# Altium PCB PCB1.PcbDoc (part 2 of 2)
Units mil, origin at the board's own origin, x right, y up, seen from the top; angles counter-clockwise.
Board outline 5190.03 x 3710.02 mil, 4 copper layers (Top Layer, nixie tubes, GND, Bottom Layer), stack 23.756 mil thick; 74 components, 90 nets, 262 pads, 53 vias.
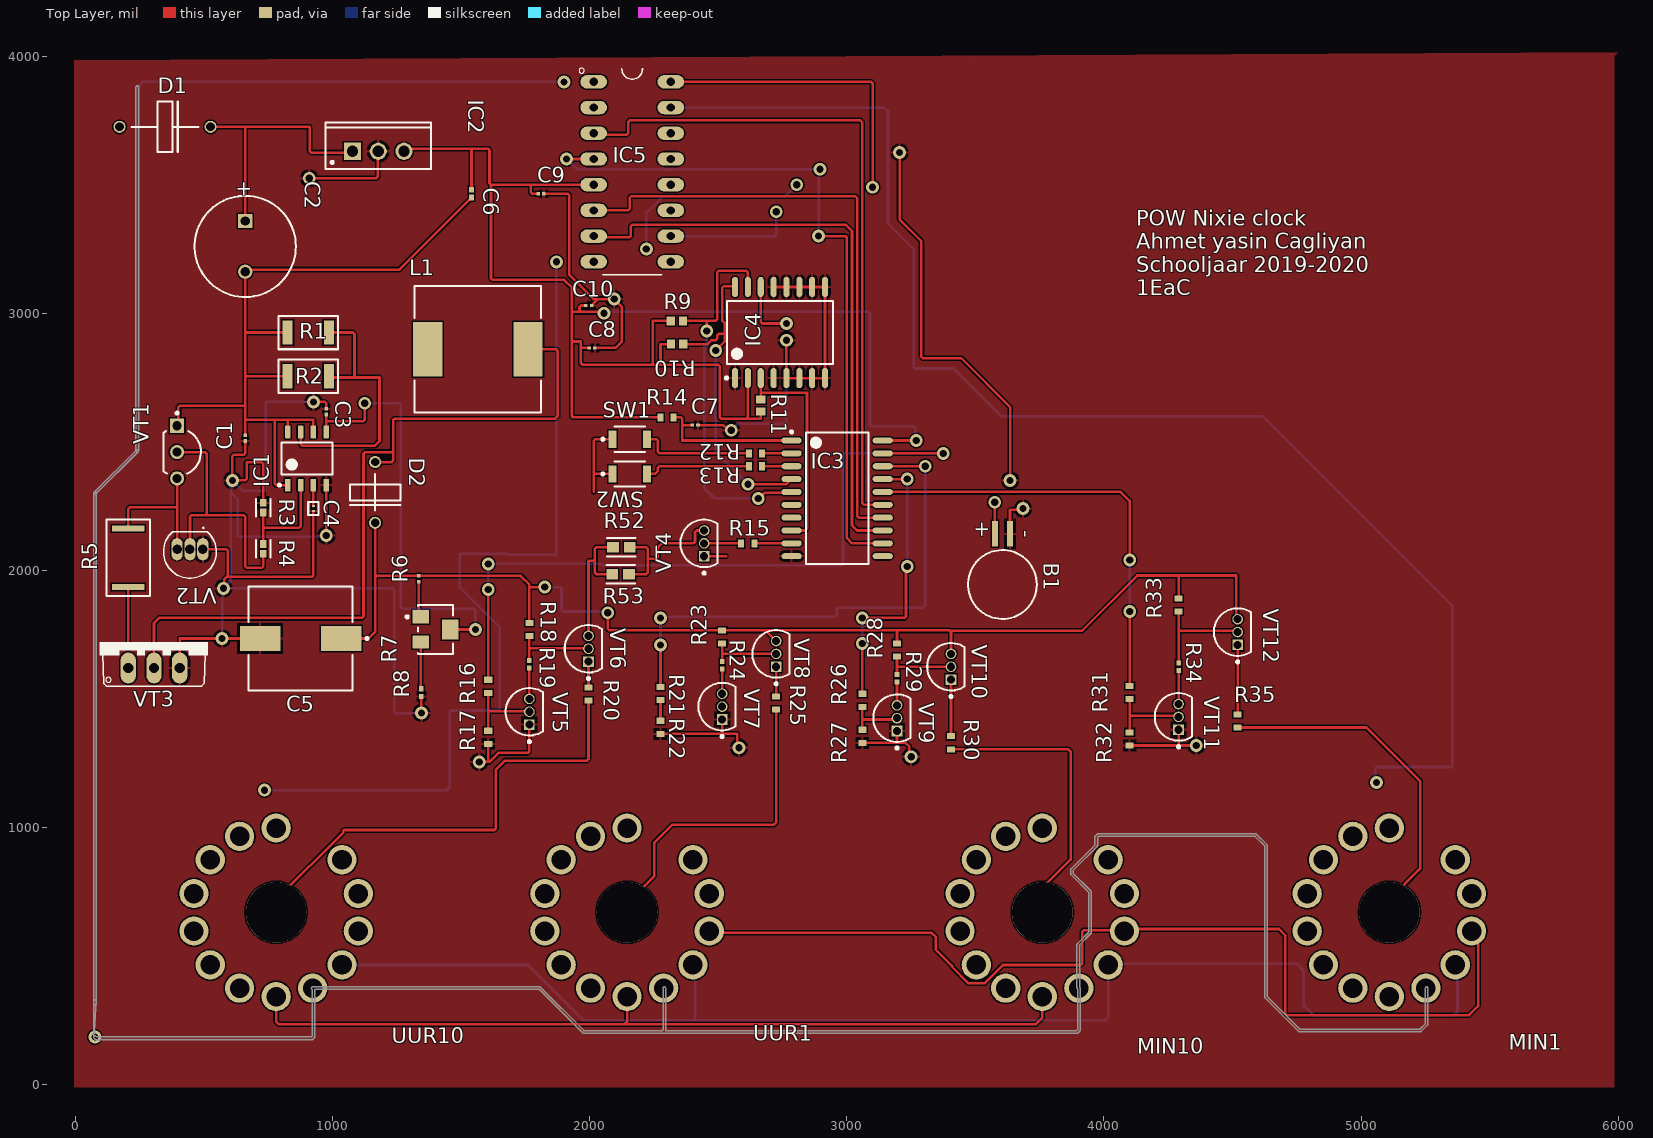
[diagram p0: Top Layer view]

## Part data (continued)
R8: library part RC0402FR-073K3L, Case Code (Imperial)=0402, Case Code (Metric)=1005, Manufacturer=Yageo, Max Operating Temperature=155°C, Max Power Dissipation=63mW, Min Operating Temperature=-55°C, Package Quantity=1, Power Rating=62.5mW, Resistance=3.3kR, Supplier Part Number 1=311-3.30KLRCT-ND, Temperature Coefficient=100ppm/°C, Tolerance=1%, Voltage Rating=50V, Case/Package=0402, Category="Chip SMD Resistors", ComponentLink1Description=https://datasheet.ciiva.com/11808/0900766b80c66297-11808441.pdf?src-supplier=RSComponents, ComponentLink1URL=https://datasheet.ciiva.com/11808/0900766b80c66297-11808441.pdf?src-supplier=RSComponents, ComponentLink2Description=https://datasheet.ciiva.com/2453/pyu-r-int-thick-7-2453395.pdf?src-supplier=Digi-Key, ComponentLink2URL=https://datasheet.ciiva.com/2453/pyu-r-int-thick-7-2453395.pdf?src-supplier=Digi-Key, ComponentLink3Description=https://datasheet.ciiva.com/16746/pyu-rc0402-51-rohs-l-6-r-16746361.pdf?src-supplier=Future+Electronics, ComponentLink3URL=https://datasheet.ciiva.com/16746/pyu-rc0402-51-rohs-l-6-r-16746361.pdf?src-supplier=Future+Electronics, ComponentLink4Description=https://datasheet.ciiva.com/2453/pyu-r-int-thick-7-2453394.pdf?src-supplier=Digi-Key, ComponentLink4URL=https://datasheet.ciiva.com/2453/pyu-r-int-thick-7-2453394.pdf?src-supplier=Digi-Key, ComponentLink5Description=https://datasheet.ciiva.com/2453/pyu-r-int-thick-7-2453396.pdf?src-supplier=Digi-Key, ComponentLink5URL=https://datasheet.ciiva.com/2453/pyu-r-int-thick-7-2453396.pdf?src-supplier=Digi-Key, ComponentLink6Description=https://datasheet.ciiva.com/46394/1018594-46394940.pdf?src-supplier=Element14, ComponentLink6URL=https://datasheet.ciiva.com/46394/1018594-46394940.pdf?src-supplier=Element14, Composition="Thick Film", Depth=0.5mm, Features="Moisture Resistant", Height=0.016inch, Lead Free="Lead Free", Length=1mm, Manufacturer Part Number=RC0402FR-073K3L, Military Standard=Not, Number of Pins=2, Number of Terminations=2, Packaging="Tape and Reel", Pricing 1="1=0,10000, 10=0,01600, 100=0,00640, 1000=0,00289, 2500=0,00251, 5000=0,00207 (USD)", REACH SVHC="No SVHC", RoHS=Yes, Stock 1=9680590, Supplier 1=Digi-Key, Termination=SMD/SMT, Voltage Rating (DC)=50V, Width=0.5mm
R9 R10 R11: library part ERA-3AEB512V, "5K1Ohm // 3.49", Case Code (Imperial)=0603, Case Code (Metric)=1608, Manufacturer=Panasonic, Max Operating Temperature=155°C, Max Power Dissipation=100mW, Min Operating Temperature=-55°C, Package Quantity=5000, Resistance=5.1kR, Supplier Part Number 1=P5.1KDBCT-ND, Temperature Coefficient=25ppm/°C, Tolerance=0.1%, Voltage Rating=75V, Case/Package=0603, Category="Chip SMD Resistors", ComponentLink1Description=https://datasheet.ciiva.com/29183/451140-da-01-en-widerstand-0603-era-29183792.pdf?src-supplier=Conrad, ComponentLink1URL=https://datasheet.ciiva.com/29183/451140-da-01-en-widerstand-0603-era-29183792.pdf?src-supplier=Conrad, ComponentLink2Description=https://datasheet.ciiva.com/5860/485442-5860519.pdf?src-supplier=Farnell, ComponentLink2URL=https://datasheet.ciiva.com/5860/485442-5860519.pdf?src-supplier=Farnell, ComponentLink3Description=https://datasheet.ciiva.com/5860/485442-5860520.pdf?src-supplier=Farnell, ComponentLink3URL=https://datasheet.ciiva.com/5860/485442-5860520.pdf?src-supplier=Farnell, ComponentLink4Description=https://datasheet.ciiva.com/24025/aoa0000ce26-197354-24025560.pdf?src-supplier=Mouser, ComponentLink4URL=https://datasheet.ciiva.com/24025/aoa0000ce26-197354-24025560.pdf?src-supplier=Mouser, Composition="Thin Film", Contact Plating=Tin, Depth=0.8mm, Height=0.022inch, Lead Free="Lead Free", Length=1.6mm, Manufacturer Part Number=ERA-3AEB512V, Military Standard=Not, Mount="Surface Mount", Number of Pins=2, Number of Terminations=2, Packaging="Tape and Reel", Power Rating=100mW, Pricing 1="1=0,34000, 10=0,28600, 100=0,11160, 1000=0,04673, 2500=0,04284 (USD)", Radiation Hardening=No, REACH SVHC="No SVHC", RoHS=Yes, Stock 1=8134, Supplier 1=Digi-Key, Termination=Solder, Voltage Rating (DC)=75V, Width=0.031inch
R12 R13 R14: library part RC0603JR-071KL, "1KOhm // 3.46", Case Code (Imperial)=0603, Case Code (Metric)=1608, Manufacturer=Yageo, Max Operating Temperature=155°C, Min Operating Temperature=-55°C, Package Quantity=5000, Power Rating=100mW, Resistance=1kR, Supplier Part Number 1=311-1.0KGRCT-ND, Temperature Coefficient=100ppm/°C, Tolerance=5%, Voltage Rating=50V, Case/Package=0603, Category="Chip SMD Resistors", ComponentLink1Description=https://datasheet.ciiva.com/8883/pyu-rc0603-51-rohs-l-4-8883051.pdf?src-supplier=Avnet, ComponentLink1URL=https://datasheet.ciiva.com/8883/pyu-rc0603-51-rohs-l-4-8883051.pdf?src-supplier=Avnet, ComponentLink2Description=https://datasheet.ciiva.com/7746/443971-7746461.pdf?src-supplier=Element14, ComponentLink2URL=https://datasheet.ciiva.com/7746/443971-7746461.pdf?src-supplier=Element14, ComponentLink3Description=https://datasheet.ciiva.com/7746/443971-7746462.pdf?src-supplier=Element14, ComponentLink3URL=https://datasheet.ciiva.com/7746/443971-7746462.pdf?src-supplier=Element14, ComponentLink4Description=https://datasheet.ciiva.com/22747/443971-22747533.pdf?src-supplier=Element14, ComponentLink4URL=https://datasheet.ciiva.com/22747/443971-22747533.pdf?src-supplier=Element14, Composition="Thick Film", Contact Plating=Tin,Matte, Depth=0.8mm, Height=0.45mm, Lead Free="Lead Free", Length=1.6mm, Manufacturer Part Number=RC0603JR-071KL, Military Standard=Not, Number of Pins=2, Packaging="Tape and Reel", Pricing 1="1=0,10000, 10=0,01900, 100=0,00770, 1000=0,00347, 2500=0,00301 (USD)", Radiation Hardening=No, REACH SVHC=Unknown, RoHS=Yes, Stock 1=7711035, Supplier 1=Digi-Key, Termination=SMD/SMT, Voltage Rating (DC)=50V, Width=0.8mm
R15 R16 R17 R18 R20 R21 R22 R23 R25 R26 R27 R28 R30 R31 R32 R33 R35: library part RC0603JR-0710KL, "10KOhm // 3.51", Case Code (Imperial)=0603, Case Code (Metric)=1608, Manufacturer=Yageo, Max Operating Temperature=155°C, Max Power Dissipation=100mW, Min Operating Temperature=-55°C, Resistance=10kR, Supplier Part Number 1=311-10KGRCT-ND, Temperature Coefficient=100ppm/°C, Tolerance=5%, Voltage Rating=50V, Case/Package=0603, Category="Chip SMD Resistors", ComponentLink1Description=https://datasheet.ciiva.com/2452/pyu-rc-group-51-rohs-l-10-2452848.pdf?src-supplier=Digi-Key, ComponentLink1URL=https://datasheet.ciiva.com/2452/pyu-rc-group-51-rohs-l-10-2452848.pdf?src-supplier=Digi-Key, Composition="Thick Film", Contact Plating=Tin,Matte, Depth=0.8mm, Features="Moisture Resistant", Height - Seated (Max)=0.022inch, Lead Free="Lead Free", Length=0.063inch, Manufacturer Part Number=RC0603JR-0710KL, Military Standard=Not, Number of Pins=2, Number of Terminations=2, Packaging="Tape and Reel", Power Rating=100mW, Pricing 1="1=0,10000, 10=0,01900, 100=0,00770, 1000=0,00347, 2500=0,00301 (USD)", Radiation Hardening=No, REACH SVHC=Unknown, RoHS=Yes, Stock 1=1984024, Supplier 1=Digi-Key, Termination=SMD/SMT, Voltage Rating (DC)=50V, Width=0.031inch
R19 R24 R29 R34: library part RC0402FR-071ML, "1M //  5.09", Case Code (Imperial)=0402, Case Code (Metric)=1005, Manufacturer=Yageo, Max Operating Temperature=155°C, Min Operating Temperature=-55°C, Power Rating=63mW, Resistance=1MR, Supplier Part Number 1=311-1.00MLRCT-ND, Temperature Coefficient=100ppm/°C, Tolerance=1%, Voltage Rating=50V, Case/Package=0402, Category="Chip SMD Resistors", ComponentLink1Description=https://datasheet.ciiva.com/11808/0900766b80c66297-11808125.pdf?src-supplier=RSComponents, ComponentLink1URL=https://datasheet.ciiva.com/11808/0900766b80c66297-11808125.pdf?src-supplier=RSComponents, ComponentLink2Description=https://datasheet.ciiva.com/46394/1018594-46394951.pdf?src-supplier=Element14, ComponentLink2URL=https://datasheet.ciiva.com/46394/1018594-46394951.pdf?src-supplier=Element14, ComponentLink3Description=https://datasheet.ciiva.com/16741/pyu-rc0402-51-rohs-l-6-r-16741081.pdf?src-supplier=Future+Electronics, ComponentLink3URL=https://datasheet.ciiva.com/16741/pyu-rc0402-51-rohs-l-6-r-16741081.pdf?src-supplier=Future+Electronics, ComponentLink4Description=https://datasheet.ciiva.com/7849/1018594-7849882.pdf?src-supplier=Element14, ComponentLink4URL=https://datasheet.ciiva.com/7849/1018594-7849882.pdf?src-supplier=Element14, ComponentLink5Description=https://datasheet.ciiva.com/7849/1018594-7849883.pdf?src-supplier=Element14, ComponentLink5URL=https://datasheet.ciiva.com/7849/1018594-7849883.pdf?src-supplier=Element14, Composition="Thick Film", Depth=0.5mm, Height=0.32mm, Lead Free="Lead Free", Length=1mm, Manufacturer Part Number=RC0402FR-071ML, Military Standard=Not, Packaging="Tape and Reel", Pricing 1="1=0,10000, 10=0,01600, 100=0,00640, 1000=0,00289, 2500=0,00251, 5000=0,00207 (USD)", REACH SVHC=Unknown, RoHS=Yes, Stock 1=3299075, Supplier 1=Digi-Key, Termination=SMD/SMT
R52 R53: library part CRGCQ0603F220K, "220KOhm //  5.12", Case Code (Imperial)=0603, Case Code (Metric)=1608, Manufacturer="TE Connectivity", Max Operating Temperature=155°C, Max Power Dissipation=100mW, Min Operating Temperature=-55°C, Resistance=220kR, Supplier Part Number 1=A129716CT-ND, Temperature Coefficient=100ppm/°C, Tolerance=1%, Case/Package=0603, ComponentLink1Description=https://4donline.ihs.com/images/VipMasterIC/IC/TYEL/TYEL-S-A0004929575/TYEL-S-A0004929575-1.pdf?hkey=52A5661711E402568146F3353EA87419&src-supplier=Newark, ComponentLink1URL=https://4donline.ihs.com/images/VipMasterIC/IC/TYEL/TYEL-S-A0004929575/TYEL-S-A0004929575-1.pdf?hkey=52A5661711E402568146F3353EA87419&src-supplier=Newark, ComponentLink2Description=https://www.te.com/commerce/DocumentDelivery/DDEController?Action=srchrtrv&amp;DocNm=1773204-3&amp;DocType=DS&amp;DocLang=English&src-supplier=Digi-Key, ComponentLink2URL=https://www.te.com/commerce/DocumentDelivery/DDEController?Action=srchrtrv&amp;DocNm=1773204-3&amp;DocType=DS&amp;DocLang=English&src-supplier=Digi-Key, ComponentLink3Description=https://4donline.ihs.com/images/VipMasterIC/IC/TYEL/TYEL-S-A0004929575/TYEL-S-A0004929575-1.pdf?hkey=52A5661711E402568146F3353EA87419&src-supplier=Farnell, ComponentLink3URL=https://4donline.ihs.com/images/VipMasterIC/IC/TYEL/TYEL-S-A0004929575/TYEL-S-A0004929575-1.pdf?hkey=52A5661711E402568146F3353EA87419&src-supplier=Farnell, Composition="Thick Film", Features="Moisture Resistant,Automotive AEC-Q200", Manufacturer Part Number=CRGCQ0603F220K, Number of Terminations=2, Packaging="Cut Tape", Pricing 1="1=0,10000, 10=0,03000, 100=0,01200, 1000=0,00541, 2500=0,00469 (USD)", RoHS=No, Stock 1=53942, Supplier 1=Digi-Key
SW1 SW2: "SWITCH TACTILE SPST-NO 0.05A 12V", Contact Current Rating=50mA, Contact Resistance=100mR, Insulation Resistance=100MR, Manufacturer=Omron, Max Operating Temperature=70°C, Max Voltage Rating (DC)=12V, Min Operating Temperature=-25°C, Operating Force=1.5N, Package Quantity=1, Ratings="Dust Proof,IP40", Supplier Part Number 1=SW1020CT-ND, Actuator Length=0.4mm, Actuator Type=Standard, Category="Tactile Switches", ComponentLink1Description=https://datasheet.ciiva.com/26917/getdatasheetpartid-552554-26917552.pdf?src-supplier=Verical, ComponentLink1URL=https://datasheet.ciiva.com/26917/getdatasheetpartid-552554-26917552.pdf?src-supplier=Verical, ComponentLink2Description=https://datasheet.ciiva.com/22696/1685550-22696214.pdf?src-supplier=Element14, ComponentLink2URL=https://datasheet.ciiva.com/22696/1685550-22696214.pdf?src-supplier=Element14, ComponentLink3Description=https://datasheet.ciiva.com/1532/1685550-1532680.pdf?src-supplier=Element14, ComponentLink3URL=https://datasheet.ciiva.com/1532/1685550-1532680.pdf?src-supplier=Element14, ComponentLink4Description=https://datasheet.ciiva.com/1634/1685550-1634396.pdf?src-supplier=Farnell, ComponentLink4URL=https://datasheet.ciiva.com/1634/1685550-1634396.pdf?src-supplier=Farnell, ComponentLink5Description=https://datasheet.ciiva.com/14142/b3u-eng-datasheet-14142540.pdf?src-supplier=Distrelec, ComponentLink5URL=https://datasheet.ciiva.com/14142/b3u-eng-datasheet-14142540.pdf?src-supplier=Distrelec, ComponentLink6Description=https://datasheet.ciiva.com/2900/b3u-1110-2900029.pdf?src-supplier=Digi-Key, ComponentLink6URL=https://datasheet.ciiva.com/2900/b3u-1110-2900029.pdf?src-supplier=Digi-Key, ComponentLink7Description=https://datasheet.ciiva.com/16155/en-b3u-16155021.pdf?src-supplier=Onlinecomponents.com, ComponentLink7URL=https://datasheet.ciiva.com/16155/en-b3u-16155021.pdf?src-supplier=Onlinecomponents.com, ComponentLink8Description=https://datasheet.ciiva.com/2900/b3u-1110-2900030.pdf?src-supplier=Digi-Key, ComponentLink8URL=https://datasheet.ciiva.com/2900/b3u-1110-2900030.pdf?src-supplier=Digi-Key, ComponentLink9Description=https://datasheet.ciiva.com/16862/70176037-16862846.pdf?src-supplier=Allied+Electronics, ComponentLink9URL=https://datasheet.ciiva.com/16862/70176037-16862846.pdf?src-supplier=Allied+Electronics, ComponentLink10Description=https://datasheet.ciiva.com/2900/b3u-1110-2900031.pdf?src-supplier=Digi-Key, ComponentLink10URL=https://datasheet.ciiva.com/2900/b3u-1110-2900031.pdf?src-supplier=Digi-Key, Contact Material=Silver, Current Rating=50mA, Depth=2.5mm, Electrical Life=200000Cycles, Height=1.2mm, Illumination Type=Non-Illuminated,Illuminated, Lead Free="Lead Free", Length=4mm, Manufacturer Part Number=B3U-1000P, Max Current Rating=50mA, Mechanical Life=200000Cycles, Mount="Surface Mount", Orientation=Straight, Packaging="Tape and Reel", Pricing 1="1=0,98000, 10=0,94300, 25=0,88120, 100=0,76500, 250=0,69612, 500=0,64536, 1000=0,59822 (USD)", REACH SVHC=Unknown, RoHS=Yes, Stock 1=6825, Supplier 1=Digi-Key, Switch Function=Off-Mom, Switch Travel=0.15mm, Termination=SMD/SMT, Throw Configuration=SPST, Voltage Rating (DC)=12V, Weight=0.000776oz, Width=3mm
VT1: Case/Package=TO-92, Collector Base Voltage (VCBO)=80V, Collector Emitter Breakdown Voltage=65V, Collector Emitter Saturation Voltage=250mV, Current Rating=100mA, Emitter Base Voltage (VEBO)=6V, Frequency=300MHz, Manufacturer="ON Semiconductor / Fairchild", Max Operating Temperature=150°C, Max Power Dissipation=500mW, Min Operating Temperature=-65°C, Package Quantity=2000, Supplier Part Number 1=BC546-ND, Category=BJTs, Collector Emitter Voltage (VCEO)=65V, ComponentLink1Description=https://datasheet.ciiva.com/982/bc546-982426.pdf?src-supplier=Digi-Key, ComponentLink1URL=https://datasheet.ciiva.com/982/bc546-982426.pdf?src-supplier=Digi-Key, ComponentLink2Description=https://datasheet.ciiva.com/1217/bc546-1217060.pdf?src-supplier=Farnell, ComponentLink2URL=https://datasheet.ciiva.com/1217/bc546-1217060.pdf?src-supplier=Farnell, ComponentLink3Description=https://datasheet.ciiva.com/1195/59761-1195461.pdf?src-supplier=Element14, ComponentLink3URL=https://datasheet.ciiva.com/1195/59761-1195461.pdf?src-supplier=Element14, ComponentLink4Description=https://datasheet.ciiva.com/4724/bc546-4724309.pdf?src-supplier=Mouser, ComponentLink4URL=https://datasheet.ciiva.com/4724/bc546-4724309.pdf?src-supplier=Mouser, Element Configuration=Single, Gain Bandwidth Product=300MHz, hFE Min=110, Lead Free="Lead Free", Manufacturer Part Number=BC546, Max Collector Current=100mA, Max Frequency=300MHz, Mount="Through Hole", Number of Elements=1, Number of Pins=3, Packaging=Bulk, Polarity=NPN, Power Dissipation=500mW, Radiation Hardening=No, REACH SVHC="No SVHC", RoHS=Yes, Supplier 1=Digi-Key, Termination="Through Hole", Transition Frequency=300MHz, Voltage Rating (DC)=65V, Weight=0.2g
VT2: library part BC556ABU, Case/Package=TO-92, Collector Base Voltage (VCBO)=-80V, Collector Emitter Breakdown Voltage=65V, Collector Emitter Saturation Voltage=-250mV, Current Rating=-100mA, Emitter Base Voltage (VEBO)=-5V, Frequency=150MHz, Manufacturer="ON Semiconductor / Fairchild", Max Collector Current=100mA, Max Frequency=10MHz, Max Operating Temperature=150°C, Max Power Dissipation=500mW, Min Operating Temperature=-65°C, Package Quantity=1000, Supplier Part Number 1=BC556ABU-ND, Voltage Rating (DC)=-65V, Category=BJTs, Collector Emitter Voltage (VCEO)=65V, ComponentLink1Description=https://datasheet.ciiva.com/46415/1817587-46415448.pdf?src-supplier=Element14, ComponentLink1URL=https://datasheet.ciiva.com/46415/1817587-46415448.pdf?src-supplier=Element14, ComponentLink2Description=https://datasheet.ciiva.com/11205/bc559-11205934.pdf?src-supplier=Avnet, ComponentLink2URL=https://datasheet.ciiva.com/11205/bc559-11205934.pdf?src-supplier=Avnet, ComponentLink3Description=https://datasheet.ciiva.com/979/bc556-979028.pdf?src-supplier=Digi-Key, ComponentLink3URL=https://datasheet.ciiva.com/979/bc556-979028.pdf?src-supplier=Digi-Key, ComponentLink4Description=https://datasheet.ciiva.com/4722/bc556-4722509.pdf?src-supplier=Mouser, ComponentLink4URL=https://datasheet.ciiva.com/4722/bc556-4722509.pdf?src-supplier=Mouser, Contact Plating=Tin,Matte, Element Configuration=Single, Gain Bandwidth Product=150MHz, Height=5.33mm, hFE Min=110, Lead Free="Lead Free", Length=5.2mm, Manufacturer Part Number=BC556ABU, Mount="Through Hole", Number of Elements=1, Number of Pins=3, Packaging=Bulk, Polarity=PNP, Power Dissipation=500mW, Pricing 1="1=0,23000, 10=0,18600, 25=0,15560, 100=0,07610, 250=0,07492, 500=0,06350, 1000=0,04412, 2500=0,04100, 5000=0,03547 (USD)", REACH SVHC="No SVHC", RoHS=Yes, Stock 1=3751, Supplier 1=Digi-Key, Transition Frequency=150MHz, Weight=0.179g, Width=4.19mm
VT3: "P-Channel 20V 6.7A _Ta_ 2.5W _Ta_ Surface Mount 8-SO", Package="TO-220 STMicroelectronics", Availability=Unavailable, MF="Vishay Siliconix", MP=IRF740, Price=None, SnapEDA_Link=https://www.snapeda.com/parts/IRF740/Vishay%20Siliconix/view-part/580033/?ref=snap
VT4 VT5 VT7 VT9 VT11: library part MPSA42G, "MPSA42 // 5.16", Case/Package=TO-92-3, Collector Base Voltage (VCBO)=300V, Collector Emitter Saturation Voltage=500mV, Current Rating=500mA, Emitter Base Voltage (VEBO)=6V, Frequency=50MHz, Manufacturer="ON Semiconductor", Max Operating Temperature=150°C, Max Power Dissipation=625mW, Min Operating Temperature=-55°C, Package Quantity=5000, Category=BJTs, Collector Emitter Breakdown Voltage=300V, Collector Emitter Voltage (VCEO)=300V, ComponentLink1Description=https://datasheet.ciiva.com/15138/getdatasheetpartid-59770-15138880.pdf?src-supplier=Verical, ComponentLink1URL=https://datasheet.ciiva.com/15138/getdatasheetpartid-59770-15138880.pdf?src-supplier=Verical, ComponentLink2Description=https://datasheet.ciiva.com/14179/snmpsa42-mpsa43-e-14179434.pdf?src-supplier=Distrelec, ComponentLink2URL=https://datasheet.ciiva.com/14179/snmpsa42-mpsa43-e-14179434.pdf?src-supplier=Distrelec, ComponentLink3Description=https://datasheet.ciiva.com/19482/878622-19482654.pdf?src-supplier=Jameco, ComponentLink3URL=https://datasheet.ciiva.com/19482/878622-19482654.pdf?src-supplier=Jameco, ComponentLink4Description=https://datasheet.ciiva.com/6359/mpsa42-d-6359479.pdf?src-supplier=Digi-Key, ComponentLink4URL=https://datasheet.ciiva.com/6359/mpsa42-d-6359479.pdf?src-supplier=Digi-Key, ComponentLink5Description=https://datasheet.ciiva.com/11197/mpsa42-d-11197448.pdf?src-supplier=Avnet, ComponentLink5URL=https://datasheet.ciiva.com/11197/mpsa42-d-11197448.pdf?src-supplier=Avnet, ComponentLink6Description=https://datasheet.ciiva.com/18404/70099551-18404762.pdf?src-supplier=Allied+Electronics, ComponentLink6URL=https://datasheet.ciiva.com/18404/70099551-18404762.pdf?src-supplier=Allied+Electronics, ComponentLink7Description=https://datasheet.ciiva.com/16201/mpsa42-d-16201884.pdf?src-supplier=Future+Electronics, ComponentLink7URL=https://datasheet.ciiva.com/16201/mpsa42-d-16201884.pdf?src-supplier=Future+Electronics, ComponentLink8Description=https://datasheet.ciiva.com/26114/mpsa42-d-26114876.pdf?src-supplier=Avnet+Europe, ComponentLink8URL=https://datasheet.ciiva.com/26114/mpsa42-d-26114876.pdf?src-supplier=Avnet+Europe, Element Configuration=Single, Gain Bandwidth Product=50MHz, Height=5.33mm, hFE Min=25, Lead Free="Lead Free", Length=5.2mm, Manufacturer Part Number=MPSA42G, Max Collector Current=500mA, Max Frequency=50MHz, Number of Elements=1, Number of Pins=3, Packaging=Bulk, Polarity=NPN, Power Dissipation=625mW, Pricing 1="1=0,07000, 25=0,07000, 100=0,07000, 500=0,07000, 1000=0,07000 (USD)", Radiation Hardening=No, REACH SVHC="No SVHC", RoHS=Yes, Stock 1=2, Supplier 1="Rochester Electronics", Supplier Part Number 1=MPSA42G, Transition Frequency=50MHz, Voltage Rating (DC)=300V, Weight=0.01lb, Width=4.19mm
VT6 VT8 VT10 VT12: library part MPSA92G, "MPSA92 // 5.19", Case/Package=TO-92-3, Collector Base Voltage (VCBO)=300V, Collector Emitter Saturation Voltage=-500mV, Current Rating=-500mA, Emitter Base Voltage (VEBO)=5V, Frequency=50MHz, Manufacturer="ON Semiconductor", Max Collector Current=500mA, Max Operating Temperature=150°C, Max Power Dissipation=625mW, Min Operating Temperature=-55°C, Package Quantity=5000, Voltage Rating (DC)=-300V, Category="Integrated Circuits (ICs)", Collector Emitter Breakdown Voltage=300V, Collector Emitter Voltage (VCEO)=300V, ComponentLink1Description=https://datasheet.ciiva.com/27050/801254-27050123.pdf?src-supplier=Jameco, ComponentLink1URL=https://datasheet.ciiva.com/27050/801254-27050123.pdf?src-supplier=Jameco, ComponentLink2Description=https://datasheet.ciiva.com/14179/mimpsa92-mpsa93-en-14179436.pdf?src-supplier=Distrelec, ComponentLink2URL=https://datasheet.ciiva.com/14179/mimpsa92-mpsa93-en-14179436.pdf?src-supplier=Distrelec, ComponentLink3Description=https://datasheet.ciiva.com/7972/672186-7972101.pdf?src-supplier=Element14, ComponentLink3URL=https://datasheet.ciiva.com/7972/672186-7972101.pdf?src-supplier=Element14, ComponentLink4Description=https://datasheet.ciiva.com/7972/672186-7972102.pdf?src-supplier=Element14, ComponentLink4URL=https://datasheet.ciiva.com/7972/672186-7972102.pdf?src-supplier=Element14, ComponentLink5Description=https://datasheet.ciiva.com/14546/70099552-14546054.pdf?src-supplier=Allied+Electronics, ComponentLink5URL=https://datasheet.ciiva.com/14546/70099552-14546054.pdf?src-supplier=Allied+Electronics, ComponentLink6Description=https://datasheet.ciiva.com/16463/mpsa92-d-16463878.pdf?src-supplier=Future+Electronics, ComponentLink6URL=https://datasheet.ciiva.com/16463/mpsa92-d-16463878.pdf?src-supplier=Future+Electronics, ComponentLink7Description=https://datasheet.ciiva.com/11197/mpsa92-d-11197607.pdf?src-supplier=Avnet, ComponentLink7URL=https://datasheet.ciiva.com/11197/mpsa92-d-11197607.pdf?src-supplier=Avnet, ComponentLink8Description=https://datasheet.ciiva.com/16478/mpsa92-d-16478619.pdf?src-supplier=Avnet+Asia, ComponentLink8URL=https://datasheet.ciiva.com/16478/mpsa92-d-16478619.pdf?src-supplier=Avnet+Asia, ComponentLink9Description=https://datasheet.ciiva.com/26114/mpsa92-d-26114891.pdf?src-supplier=Avnet+Europe, ComponentLink9URL=https://datasheet.ciiva.com/26114/mpsa92-d-26114891.pdf?src-supplier=Avnet+Europe, ComponentLink10Description=https://datasheet.ciiva.com/6359/mpsa92-d-6359455.pdf?src-supplier=Digi-Key, ComponentLink10URL=https://datasheet.ciiva.com/6359/mpsa92-d-6359455.pdf?src-supplier=Digi-Key, Element Configuration=Single, Gain Bandwidth Product=50MHz, Height=5.33mm, hFE Min=25, Lead Free="Lead Free", Length=5.2mm, Manufacturer Part Number=MPSA92G, Max Frequency=50MHz, Number of Elements=1, Number of Pins=3, Packaging=Bulk, Polarity=PNP, Power Dissipation=625mW, Pricing 1="1=0,25000, 21=0,20000, 51=0,12500, 401=0,09000 (USD)", Radiation Hardening=No, REACH SVHC="No SVHC", RoHS=Yes, Stock 1=3237, Supplier 1=Quest, Supplier Part Number 1=MPSA92G, Transition Frequency=50MHz, Weight=0.01lb, Width=4.19mm

## Via types
v1: diameter 50, hole 28, Top Layer to Bottom Layer, 53 vias

## Nets (pads, with @x,y where several pads share a name; then routed paths per layer and width w, separated by ;. In a path a pad name is that pad's centre, name@x,y a point inside that pad or via, vN(x,y) a via of type N, cw(c..) or ccw(c..) an arc to the next point about the centre after c; other vN are vias at no path point)
9-15V: 
"9-15V DC INPUT": 
+5V: 
GND: B1.2 C1.2 C3.2 C4.2 C5.2 C7.2 C8.2 C9.2 C10.2 IC1.4 IC2.2 IC3.10 IC4.1 IC4.4 IC4.5 IC4.6 IC4.7 IC4.8 IC4.9 IC4.10 IC4.11 IC4.12 IC4.13 R3.1 R8.1 R17.1 R22.1 R27.1 R32.1 VT2.1 VT3.S VT5.1 VT7.1 VT9.1 VT11.1 | length 14577.5
  Top Layer w10: VT3.S 405,1734.14 ; 405,1735 v1(570,1735) C5.2 ; VT2.1@505,2082.05 586.77,2082.05 592.63,2076.19 592.63,1979.14 ; v1(575,1930) 577.53,1932.53 577.53,1964.04 592.63,1979.14 ; C1.2 660,2455.86 654.14,2450 615.86,2450 610,2444.14 v1(610,2350) 659.14,2350 665,2355.86 665,2420 ; 665.86,2420 724.14,2420 730,2414.14 R3.1 ; v1(908.94,3525) 1169.14,3525 1175,3530.86 IC2.2@1175,3630 ; C4.2 925,1980.86 919.14,1975 592.63,1975 592.63,1979.14 ; v1(925,2655) 969.14,2655 975,2649.14 C3.2 ; v1(975,2135) IC1.4 ; v1(1345,1445) R8.1 ; v1(1570,1255) 1610,1255 ; R17.1 1605,1260 1610,1255 ; VT5.1 1765,1295.86 1759.14,1290 1645,1290 1610,1255 ; C9.2 1914.14,3465 1920,3459.14 1920,3150 2015,3055 2032.05,3055 ; C10.2 2007.83,3030 2009.13,3031.3 2009.13,3032.09 2032.05,3055 ; C8.2 2100,2865 2125,2890 2125,3025 v1(2095,3055) 2032.05,3055 ; R22.1 2573.82,1363.82 2573.82,1316.18 v1(2580,1310) ; C7.2 2519.18,2565 2539.18,2545 v1(2550,2545) ; 2515,1365 VT7.1 ; IC4.13 IC4.12 IC4.11 IC4.10 IC4.9 IC4.8 IC4.7 IC4.6 IC4.5 v1(2765,2895) ; R27.1 3228.82,1328.82 3242.64,1315 3242.64,1282.36 v1(3250,1275) ; 3195,1330 VT9.1 ; v1(3205,3625) 3205,3365 3290,3280 3290,2830.86 3295.86,2825 3445,2825 3635,2635 v1(3635,2350) ; B1.2 3634.53,2235 3680,2235 v1(3685,2240) ; R32.1 v1(4358.82,1318.82) ; 4290,1320 VT11.1
  nixie tubes w10: v1(2765,2895) 2575.86,2895 2570,2900.86 2570,3024.14 2564.14,3030 2140.86,3030 2135,3035.86 2135,3690 2085,3740 2050,3740 ccw(c2041,3700) 2041,3741 1981,3741 1980,3740 1891.02,3740 1825.86,3805.16 1825.86,3882.43 1884.43,3941 2972.28,3941 3205,3708.28 v1(3205,3625)
  Bottom Layer w10: v1(570,1735) 570,1925 v1(575,1930) ; v1(925,2655) 745.86,2655 740,2649.14 740,2315.86 734.14,2310 650,2310 v1(610,2350) 603.28,2343.28 603.28,2305 ; v1(975,2135) 970,2130 635.86,2130 630,2135.86 630,2278.28 603.28,2305 ; v1(1345,1445) 1245.86,1445 1240,1450.86 1240,1924.14 1234.14,1930 v1(575,1930) ; v1(2550,2545) 2575,2570 2759.14,2570 2765,2575.86 v1(2765,2895) ; v1(575,1930) 603.28,1958.28 603.28,2305
NetB?_15: B1.1 IC4.14 | length 1723.5
  Top Layer w10: IC4.14 2665,2965.86 2670.86,2960 v1(2765,2960) ; B1.1 v1@3575.47,2265
  nixie tubes w10: v1(2765,2960) 2770,2955 2979.14,2955 2985,2949.14 2985,2595.86 2990.86,2590 3365,2590 3369.98,2585.02 3575,2380 v1@3575,2275.58
  other v1: 3575,2265
NetBL1_82: 
NetBL1_83: 
NetBL2_83: 
NetBL3_82: 
NetBL3_83: 
NetC2_+: 
NetC3_49: C3.1 IC1.5 R7.2 | length 1681.9
  Top Layer w10: IC1.5 C3.1 ; 975,2580 1119.14,2580 1125,2585.86 v1(1125,2650) ; R7.2 v1(1555,1770)
  Bottom Layer w10: v1(1125,2650) 1259.14,2650 1265,2644.14 1265,2085 1265,1920 1265,1855.86 1270.86,1850 1549.14,1850 1555,1844.14 v1(1555,1770)
NetC4_51: C4.1 IC1.3 | length 81.8
  Top Layer w10: C4.1 IC1.3
NetC7_+: C7.1 IC3.1 R14.1 | length 580.4
  Top Layer w10: R14.1 2354.14,2595 2360,2589.14 2360,2565 ; C7.1@2395,2565 2360,2565 ; IC3.1 2360,2505 2360,2565
NetC8_49: 
NetD2_56: D2.A L1.2 VT3.D | length 2999.2
  Top Layer w10: VT3.D 305,1795 325,1815 1114.14,1815 1120,1820.86 1120,2454.14 1125.86,2460 1235,2460 ; D2.A 1229.14,2421.22 1235,2427.08 1235,2584.14 1240.86,2590 1865,2590 1875,2600 1875,2854.14 1869.14,2860 L1.2
NetGL1_82: 
NetGL1_83: 
NetGL2_83: 
NetGL3_82: 
NetGL3_83: 
NetIC1_2: IC1.2 R3.2 R4.1 | length 430.7
  Top Layer w10: R4.1 R3.2 ; 730,2165 869.14,2165 875,2170.86 IC1.2
NetIC1_7: IC1.7 R1.2 R2.2 | length 1082.2
  Top Layer w10: IC1.7 875,2490.86 880.86,2485 1164.14,2485 1182.07,2502.93 1182.07,2750 1085,2750 ; R2.2 990,2750 1085,2750 ; R1.2 1079.14,2925 1085,2919.14 1085,2750
NetIC3_2: IC3.2 R12.1 | length 115
  Top Layer w10: R12.1 IC3.2
NetIC3_3: IC3.3 R13.1 | length 114.4
  Top Layer w10: R13.1 IC3.3
NetIC3_4: IC3.4 IC4.16 R10.1 | length 1252.2
  Top Layer w10: R10.1 2415,2880 2458.43,2880 2473.43,2895 2489.14,2895 2495,2900.86 2495,2914.14 2500.86,2920 2525,2920 ; v1(2490,2855) 2525,2890 2525,2962.07 2515,2972.07 2515,3099.14 2520.86,3105 2562.17,3105 IC4.16 ; v1(2615,2335) 2765,2335 IC3.4
  Bottom Layer w10: v1(2490,2855) 2490,2460 v1(2615,2335)
NetIC3_5: IC3.5 IC4.15 R9.1 | length 1521.5
  Top Layer w10: R9.1 2455,2970 ; v1(2454.79,2930.39) 2455,2930.6 2455,2970 ; IC4.15 2615,3159.14 2609.14,3165 2500.86,3165 2495,3159.14 2495,2975.86 2489.14,2970 2455,2970 ; v1(2655,2280) 2658.28,2280 2680.78,2302.5 2782.5,2302.5 IC3.5
  Bottom Layer w10: v1(2454.79,2930.39) 2455,2930.19 2455,2876.3 2445,2866.3 2445,2320 2485,2280 v1(2655,2280)
NetIC3_8: IC3.8 IC4.3 R11.1 | length 854.4
  Top Layer w10: R11.1 2665,2690 ; IC4.3 2665,2690 ; IC3.8 2839.14,2155 2845,2160.86 2845,2690 2665,2690
NetIC3_9: IC3.9 R15.1 | length 145
  Top Layer w10: R15.1 IC3.9
NetIC3_12: IC3.12 IC5.4 | length 2793
  Top Layer w10: v1(1910,3600) IC5.4 ; v1@2895,3300 2994.14,3300 3000,3294.14 3000,2125 3020,2105 IC3.12
  Bottom Layer w10: v1(1910,3600) 1947.07,3562.93 1950,3560 2280,3560 ccw(c2289,3600) 2289,3559 2341,3559 ccw(c2341,3600) 2350,3560 v1(2895,3560) 2890,3555 v1(2890,3300)
NetIC3_13: IC3.13 IC5.7 | length 2332.7
  Top Layer w10: IC5.7 2020,3295 2154.14,3295 2160,3300.86 2160,3339.14 2165.86,3345 2994.14,3345 3020,3319.14 3020,2175 3040,2155 IC3.13
NetIC3_14: IC3.14 IC5.6 | length 2414.9
  Top Layer w10: IC5.6 2149.14,3400 2155,3405.86 2155,3449.14 2160.86,3455 3033.01,3455 3040,3448.01 3040,2210.86 3045.86,2205 IC3.14
NetIC3_15: IC3.15 IC5.3 | length 2661.4
  Top Layer w10: IC5.3 2020,3695 2144.14,3695 2150,3700.86 2150,3744.14 2155.86,3750 3052.01,3750 3060,3742.01 3060,2260.86 3065.86,2255 IC3.15
NetIC3_16: IC3.16 R31.2 | length 1694.6
  Top Layer w10: IC3.16 4065,2305 4100,2270 v1(4100,2040) ; R31.2 v1(4100,1840)
  Bottom Layer w10: v1(4100,1840) v1(4100,2040)
NetIC3_17: IC3.17 R26.2 | length 1099.3
  Top Layer w10: R26.2 v1(3060,1715) ; v1(3060,1815) 3224.14,1815 3230,1820.86 3230,2010 v1(3235,2015) ; IC3.17 v1(3235,2355)
  Bottom Layer w10: v1(3060,1715) v1(3060,1815) ; v1(3235,2015) v1(3235,2355)
NetIC3_18: IC3.18 R21.2 | length 2038.8
  Top Layer w10: R21.2 v1(2275,1710) ; IC3.18 v1(3305,2405)
  Bottom Layer w10: v1(2275,1710) v1(2275,1815) 2280,1820 2954.14,1820 2960,1825.86 2960,1849.14 2965.86,1855 3295,1855 3305,1865 v1(3305,2405)
NetIC3_19: IC3.19 R16.2 | length 2897.4
  Top Layer w10: R16.2 v1(1605,1925) ; IC3.19 v1(3375,2455)
  Bottom Layer w10: v1(1605,1925) v1(1605,2025) 2044.85,2025 2050.51,2019.33 2979.14,2019.33 2985,2025.19 2985,2145 ; 2985,2135 2985,2449.14 2990.86,2455 v1(3375,2455)
NetIC5_1: IC5.1 MIN1.P9 MIN10.P9 UUR1.P9 UUR10.P9 | length 12765.6
  nixie tubes w10: v1(75,185) 80,180 920,180 925,185 925,371.85 UUR10.P9 1805.28,374.72 1975,205 2284.14,205 ; v1(1900,3900) IC5.1 ; UUR1.P9@2290,374.72 2290,210.86 2284.14,205 ; MIN1.P9@5255,374.72 5255,235 5230,210 4760,210 4630,340 4630,930 4590,970 3975.86,970 3970,964.14 3970,930 3875,835 3875,820 3945,750 3945,590 3900,545 3900,376.85 MIN10.P9 3902.13,210.86 3896.27,205 2284.14,205
  Bottom Layer w10: v1(75,185) 75,325 ; 75,315 75,2300 240,2465 240,3880 260,3900 v1(1900,3900)
NetIC5_2: IC5.2 MIN1.P10 MIN10.P10 UUR1.P10 UUR10.P10 | length 11755.1
  nixie tubes w10: IC5.2 1900.86,3800 1895,3805.86 1895,3839.14 1900.86,3845 3040,3845 3140,3745 3140,3340 3240,3240 3240,2757.5 3245.86,2751.64 3414.93,2751.64 3586.57,2580 4462.06,2580 4610,2580 5330,1860 5330,970.86 5335.86,965 5380,965 5515,830 5515,520 5460,465 5366.97,465 MIN1.P10
  Bottom Layer w10: UUR10.P10 1036.97,465 1760,465 1975,250 2404.14,250 ; UUR1.P10@2410,465.67 2410,255.86 2404.14,250 ; MIN1.P10@5375,465.67 5375,285 5360.26,270.26 4814.74,270.26 4777.5,307.5 4777.5,442.5 4750,470 4020.63,470 MIN10.P10 4016.3,261.3 4005,250 2404.14,250
NetIC5_8: IC5.8 MIN1.P2 MIN10.P2 UUR1.P2 UUR10.P2 | length 8893.5
  nixie tubes w10: v1(735,1145) 730,1140 640,1140 640,967.4 UUR10.P2 710.67,965.28 750.18,925.77 830.77,925.77 855,950 870,965 870,1005 925,1060 1999.14,1060 2005,1054.14 2005,967.4 UUR1.P2 2010,958.15 2010,890.86 2015.86,885 2185,885 2214.14,885 2220,890.86 2220,1069.14 2225.86,1075 3508.15,1075 3623.01,960.14 3689.86,960.14 3717.09,939.95 ; v1(1870,3200) IC5.8 ; 3717.13,939.92 ccw(c3760,997.76) 3810.94,946.89 3845,980.95 3845,1005 3845,1084.14 3850.86,1090 4960,1090 4970,1080 MIN1.P2@4970,965.28
  Bottom Layer w10: v1(735,1145) 1445,1145 1455,1155 1455,1449.14 1460.86,1455 1644.14,1455 1650,1460.86 1650,1777.43 1495,1932.43 1495,2059.14 1500.86,2065 1677.07,2065 1682.07,2060 1864.14,2060 1870,2065.86 v1(1870,3200)
NetIC5_9: IC5.9 MIN1.P3 MIN10.P3 UUR1.P3 UUR10.P3 | length 10169.1
  nixie tubes w10: UUR10.P3@531.63,877.26 547.3,892.93 844.64,892.93 900,948.28 900,1005 933.36,1038.36 1887.07,1038.36 1892.93,1032.5 UUR1.P3@1892.93,877.26 ; UUR1.P3@1896.63,877.26 1908.89,865 2227.43,865 2245,882.57 2245,1027.43 2267.57,1050 3422.07,1050 3427.93,1044.14 3427.93,960.96 3515.96,872.93 3657.07,872.93 3662.93,878.79 3662.93,903.52 3668.1,908.7 3736.97,908.7 ccw(c3760,997.76) 3783.03,908.7 3805.41,908.7 3865,968.28 3865,1052.43 3882.57,1070 4850.86,1070 4862.93,1057.93 MIN1.P3@4862.93,877.26 ; IC5.9@2322.93,3202.93 3092.93,3202.93 3092.93,2628.79 3098.79,2622.93 3367.07,2622.93 3557.07,2432.93 4537.93,2432.93 5182.93,1787.93 5182.93,963.88 5096.31,877.26 MIN1.P3@4861.63,877.26
NetIC5_10: IC5.10 MIN1.P8 MIN10.P8 UUR1.P8 UUR10.P8 | length 11702.3
  Top Layer w10: UUR10.P8 780,245 790,235 2135,235 ; UUR1.P8 2145,245 2135,235 ; MIN10.P8 3760,260 3735,235 2135,235
  nixie tubes w10: v1(2725,3395) 2730,3390 3074.14,3390 3080,3384.14 3080,3295.86 3085.86,3290 3118.99,3290 3180,3228.99 3180,2730 3200,2710 3400,2710 3580,2530 4575,2530 5275,1830 5275,910 5179.14,814.14 5179.14,805.86 5255,730 5255,620 5155,520 5115.86,520 5110,514.14 MIN1.P8 5110,260.86 5104.14,255 4760,255 4655,360 4655,970 4635,990 3955.86,990 3950,984.14 3950,938.28 3855,843.28 3855,805 3925,735 3925,600 3835,510 3770.86,510 3765,504.14 3765,347.24 MIN10.P8
  Bottom Layer w10: IC5.10 2719.14,3300 2725,3305.86 v1(2725,3395) v1@2730,3400
NetIC5_11: IC5.11 MIN1.P7 MIN10.P7 UUR1.P7 UUR10.P7 | length 11619.1
  nixie tubes w10: UUR10.P7 745,481.85 745,524.14 750.86,530 992.19,530 cw(c1036.3,406.81) 1036.23,537.66 cw(c1036.3,465.67) 1075.63,525.96 1079.22,525 1706.72,525 1709.65,522.07 1746.72,485 1790.85,485 1796.71,479.14 1796.71,427.57 1854.28,370 UUR1.P7@2002.87,370 ; UUR1.P7 1995,382.6 1995,489.14 2000.86,495 2270.16,495 2390.16,375 MIN10.P7@3617.87,375 ; IC5.11 2380,3400 2440,3340 2924.14,3340 2930,3334.14 2930,3275.86 2935.86,3270 3110.71,3270 3139.14,3241.57 3160,3220.71 3160,2690.86 3165.86,2685 3389.85,2685 3574.85,2500 4565,2500 5250,1815 5250,920 5140,810 4960,810 4890,740 4890,560 4967.87,482.13 MIN1.P7 ; MIN10.P7 3635,391.85 3635,599.14 3629.14,605 3555.86,605 3550,610.86 3550,703.43 3625,778.43 3625,804.14 3630.86,810 3708.28,810 3713.28,815 3715,815 3745,845 3828.28,845 3925,941.72 3925,1004.14 3930.86,1010 4660,1010 4679.99,990.01 4679.99,420.01 4735,365 MIN1.P7@4967.87,365
NetIC5_13: IC5.13 MIN1.P4 MIN10.P4 UUR1.P4 UUR10.P4 | length 12361.5
  nixie tubes w10: UUR10.P4 542.83,742.83 585,785 585,833.82 621.18,870 850,870 920,940 920,996.72 941.64,1018.36 1806.64,1018.36 1815,1010 1815,753.15 UUR1.P4 1827.48,745 1934.14,745 1940,750.86 1940,823.82 1961.18,845 2240,845 2265,870 2265,1019.14 2270.86,1025 3350,1025 3360,1015 3360,823.15 MIN10.P4 3442.48,745 3535,745 3580,790 3580,844.14 3585.86,850 3689.14,850 3724.91,885.77 3810.77,885.77 3885,960 3885,1044.14 3890.86,1050 4769.14,1050 4775,1044.14 MIN1.P4@4775,742.83 ; v1(2220,3250) 2440,3250 2460,3230 3094.14,3230 3115,3209.14 3115,2648.79 3120.86,2642.93 3375.36,2642.93 3563.28,2455 4544.14,2455 5205,1794.14 5205,945 5117.26,857.26 4947.26,857.26 4892.34,802.34 4849.82,802.34 MIN1.P4 ; IC5.13 2794.14,3600 2800,3594.14 2800,3505 v1(2805,3500)
  Bottom Layer w10: v1(2220,3250) 2220,3390 2285,3455 2760,3455 v1(2805,3500)
NetIC5_14: IC5.14 MIN1.P5 MIN10.P5 UUR1.P5 UUR10.P5 | length 12347.4
  nixie tubes w10: UUR10.P5@460.32,600 544.14,600 605,660.86 605,819.14 610.86,825 628.28,825 651.64,848.36 858.36,848.36 950,940 950,989.14 955.86,995 1739.14,995 1745,989.14 1745,605 1752.83,597.17 UUR1.P5 1833.15,605 1964.14,605 1970,610.86 1970,815 1980,825 2248.28,825 2290,866.72 2290,999.14 2295.86,1005 3300,1005 3335,970 3335,702.48 MIN10.P5 3442.48,595 3509.14,595 3515,600.86 3515,719.14 3520.86,725 3543.28,725 3600,781.72 3600,815 3615,830 3700,830 3735,865 3820,865 3905,950 3905,1024.14 3910.86,1030 4694.14,1030 4700,1024.14 4700,615 4717.83,597.17 MIN1.P5 4803.15,610 4864.14,610 4870,615.86 4870,750 4955,835 5130,835 5225,930 5225,1802.43 4552.43,2475 3571.57,2475 3381.57,2665 3140.86,2665 3135,2670.86 3135,3217.43 3102.43,3250 2495,3250 2420,3325 2393,3325 2377,3341 2235.86,3341 2230,3346.86 2230,3695 2240.86,3705.86 2309.14,3705.86 IC5.14
NetIC5_15: IC5.15 MIN1.P1 MIN10.P1 UUR1.P1 UUR10.P1 | length 10255.1
  nixie tubes w10: UUR10.P1 780,1106.55 785.86,1112.4 2143.6,1112.4 2146.01,1110 ; UUR1.P1 2149.46,1002.22 2149.46,1106.55 2146.01,1110 ; MIN10.P1 3760,1110 ; v1(5060,1175) 5109.14,1175 5115,1169.14 5115,1110 ; MIN1.P1 5115,1002.76 5115,1110 ; 2146.01,1110 3760,1110 ; 3760,1110 5115,1110
  Bottom Layer w10: IC5.15 3145,3800 3160,3785 3160,3350 3260,3250 3260,2790.86 3265.86,2785 3415,2785 3600,2600 4616.72,2600 5355.86,1860.86 5355,1860 5355,1240.86 5349.14,1235 5060.86,1235 5055,1229.14 5055,1180 v1(5060,1175)
NetIC5_16: IC5.16 MIN1.P11 MIN10.P11 UUR1.P11 UUR10.P11 | length 11452.8
  Top Layer w10: UUR10.P11@1089.68,592.17 UUR10.P11@1092.83,592.17 ; IC5.16 3094.14,3900 3100,3894.14 v1(3100,3490) ; UUR1.P11 2471.85,590 3330,590 3345,575 3345,525.86 3409.44,461.42 3409.44,458.12 3473.88,393.68 3535.02,393.68 3606.34,465 3909.14,465 3915,470.86 3915,594.14 3920.86,600 MIN10.P11@4079.69,600 ; MIN10.P11 4087.52,605 4680,605 4705,580 4705,275.86 4710.86,270 5420,270 5455,305 5455,571.85 MIN1.P11
  nixie tubes w10: UUR10.P11 1702.83,597.17 1745,555 1745,515 1755,505 1810.85,505 1816.71,499.14 1816.71,435.85 1858.88,393.68 1918.52,393.68 1960.69,435.85 1960.69,500.69 2010,550 2076.75,550 2089.86,536.89 2206.89,536.89 2270,600 UUR1.P11@2464.68,600 ; v1(3100,3490) 3100,3320.86 3105.86,3315 3135,3315 3206.64,3243.36 3206.64,2737.5 3212.5,2731.64 3406.64,2731.64 3586.64,2551.64 4598.36,2551.64 5295,1855 5295,901.72 5210.78,817.5 5210.78,809.22 5275,745 5275,645 5322.83,597.17 MIN1.P11
NetIC6_2: 
NetIC6_3: 
NetIC6_4: 
NetIC6_6: 
NetIC6_7: 
NetMIN1_11: 
NetMIN10_11: 
NetR4_41: R4.2 VT1.2 VT2.2 | length 1027.9
  Top Layer w10: VT1.2 504.14,2460 510,2454.14 510,2215 ; VT2.2@440,2077.05 VT2.2 445,2209.14 450.86,2215 510,2215 ; R4.2 730,2015.86 724.14,2010 665.86,2010 660,2015.86 660,2209.14 654.14,2215 510,2215
NetR5_38: R5.1 VT1.3 VT2.3 | length 543.8
  Top Layer w10: R5.1 205,2239.14 210.86,2245 395,2245 ; VT2.3 VT1.3
NetR5_39: VT3.G
NetR6_44: 
NetR7_18: 
NetR15_72: 
NetR16_72: 
NetR18_72: 
NetR18_73: 
NetR19_86: 
NetR20_72: 
NetR20_73: 
NetR21_72: 
NetR23_72: 
NetR24_86: 
NetR25_72: 
NetR25_73: 
NetR26_72: 
NetR28_72: 
NetR29_86: 
NetR30_73: 
NetR31_72: 
NetR33_72: 
NetR34_86: 
NetR35_73: 
NetR37_72: 
NetR40_72: 
NetR42_73: 
NetR43_73: 
NetR44_73: 
NetR52_88: 
NetRL1_83: 
NetRL2_83: 
NetRL3_83: 
"OUTPUT  +NV(85-220V +-5%)": 
"OUTPUT +5V": 
pads on no net: C1.1 C2.1 C2.2 C5.1 C6.1 C6.2 C8.1 C9.1 C10.1 D1.A D1.K D2.K IC1.1 IC1.6 IC1.8 IC2.1 IC2.3 IC3.6 IC3.7 IC3.11 IC3.20 IC4.2 IC5.GND IC5.VCC L1.1 MIN1.None MIN1.P6 MIN1.P12 MIN1.P13 MIN10.None MIN10.P6 MIN10.P12 MIN10.P13 R1.1 R2.1 R5.2 R6.1 R6.2 R7.1 R7.3 R8.2 R9.2 R10.2 R11.2 R12.2 R13.2 R14.2 R15.2 R16.1 R17.2 R18.1 R18.2 R19.1 R19.2 R20.1 R20.2 R21.1 R22.2 R23.1 R23.2 R24.1 R24.2 R25.1 R25.2 R26.1 R27.2 R28.1 R28.2 R29.1 R29.2 R30.1 R30.2 R31.1 R32.2 R33.1 R33.2 R34.1 R34.2 R35.1 R35.2 R52.1 R52.2 R53.1 R53.2 SW1.1 SW1.2 SW2.1 SW2.2 UUR1.None UUR1.P6 UUR1.P12 UUR1.P13 UUR10.None UUR10.P6 UUR10.P12 UUR10.P13 VT1.1 VT4.1 VT4.2 VT4.3 VT5.2 VT5.3 VT6.1 VT6.2 VT6.3 VT7.2 VT7.3 VT8.1 VT8.2 VT8.3 VT9.2 VT9.3 VT10.1 VT10.2 VT10.3 VT11.2 VT11.3 VT12.1 VT12.2 VT12.3
copper on no net: | length 27097.9
  Top Layer w10: 205,1695 205,1935 ; 395,2562.36 400,2567.36 400,2635 405,2640 660,2640 ; 515,3725 707.95,3725 908.94,3725 910,3723.94 910,3630.86 915.86,3625 1077.2,3625 ; 660,2525 660,2585 ; 660,3358.43 660,3725 ; 779.09,669.09 779.09,718.93 1041.37,981.21 1041.37,986.3 1045.07,990 1629.14,990 1635,995.86 1635,1225 1670,1260 1989.14,1260 1995,1265.86 1995,1488.82 ; 825,2331.65 780.86,2331.65 775,2337.51 775,2585 ; 825,2538.35 825,2585 ; 825,2755 660,2755 ; 825,2925 660,2925 ; 925,2538.35 925,2585 825,2585 ; 1032.48,1735 1140,1735 1165,1760 1165,1972.5 ; 1089.68,737.83 1089.68,739.68 ; 1165,2185 1165,1972.5 ; 1307.8,3640 1540,3640 ; 1335,1815 1335,1955 ; 1342.91,1539.53 1342.91,1720.79 ; 1540,3450.04 1540,3449.25 1534.76,3444.02 1533.98,3444.02 1259.96,3170 908.94,3170 668.43,3170 660,3161.57 660,2925 ; 1540,3479.96 1540,3640 ; 1605,1380 1605,1523.23 ; 1605,1451.61 1763.39,1451.61 1765,1450 ; 1765,1500 1765,1590 1765,1620.47 ; 1765,1650 1765,1743.82 ; 1765,1696.91 1993.09,1696.91 1995,1695 ; 1765,1795 1765,1945 1731.38,1978.62 1558.62,1978.62 1376.38,1978.62 1335,1978.62 1171.12,1978.62 1165,1972.5 ; 1765,1935 v1(1825,1935) ; 1798.98,3465 1775.86,3465 1770,3470.86 1770,3500 ; 1935,3005 1960,3005 ; 1985,3030 1965.86,3030 1960,3024.14 1960,3005 ; 1995,1545 1995,1645 ; 1995,1745 1995,2035 1997.5,2037.5 2020,2037.5 ; 1997.95,2865 1965,2865 ; 2015,2305 2015,2504.14 2020.86,2510 2088.07,2510 ; 2015,2375 2088.07,2375 ; 2015,3500 1770,3500 ; v1@2055,3005 1960,3005 ; v1(2070,1835) 2070,1772.04 2075.86,1766.18 2515,1766.18 2683.82,1766.18 ; 2087.44,1985 2025.86,1985 2020,1990.86 2020,2084.14 2025.86,2090 2090,2090 ; 2145,670 2145,705 2250,810 2250,940 2252.93,942.93 2255,945 2320,1010 2715,1010 2725,1020 2725,1458.82 ; 2152.56,1985 2219.14,1985 2225,1990.86 2225,2084.14 2219.14,2090 2155.12,2090 ; 2221.93,2375 2254.14,2375 2265,2385.86 2265,2399.14 2270.86,2405 2575,2405 2619.41,2405 ; 2221.93,2510 2259.14,2510 2265,2504.14 2265,2460.86 2270.86,2455 2575,2455 2618.82,2455 ; 2225,2045 2259.14,2045 2265,2050.86 2265,2090 2267.5,2092.5 2280,2105 2403.47,2105 2409.33,2110.86 2409.33,2140.67 2409.14,2140.86 2409.14,2149.14 2415,2155 2445,2155 ; 2275,1415 2275,1495 ; 2275,2595 1935,2595 1930,2600 1930,2890 ; 2315,2970 2245,2970 2245,2800 ; 2316.38,2880 2275,2880 2275,2800 ; 2445,2055 2530,2055 ; 2445,2105 2588.82,2105 ; 2515,1520 2515,1615.47 ; 2515,1645 2515,1715 ; 2515,1675 2725,1675 ; 2615,2747.83 2615,2595.86 2609.14,2590 ; 2665,2617.76 2665,2590 2609.14,2590 ; 2725,1510 2725,1625 ; 2725,1725 2683.82,1766.18 ; 3060,1380 3060,1468.82 ; 3060,1420 3190,1420 3195,1425 ; 3139.33,2505 v1(3270,2505) v1@3290,2505 ; 3195,1475 3195,1565.47 ; 3195,1595 3195,1665 ; 3195,1625 3405,1625 ; 3195,1716.18 3195,1765 ; 3405,1303.82 3861.18,1303.82 3870,1295 3870,875 3765,770 3765,675 ; 3405,1355 3405,1575 ; 3405,1675 3405,1760.32 3399.14,1766.18 3195,1766.18 2683.82,1766.18 ; 3405,1765 3609.14,1765 3915,1765 4130,1980 4290,1980 ; 4100,1370 4100,1499.41 ; 4100,1435 4285,1435 4290,1430 ; 4290,1480 4290,1610.24 ; 4290,1639.76 4290,1840 ; 4290,1765 4515,1765 4520,1760 ; 4290,1891.18 4290,1980 ; 4520,1388.82 5021.18,1388.82 5230,1180 5230,840 5110,720 5110,670 ; 4520,1440 4520,1710 ; 4520,1810 4515,1815 4515,1980 4290,1980 ; 660,2585 660,2640 ; 660,2585 775,2585 ; 660,2640 660,2755 ; 660,2755 660,2925 ; 775,2585 825,2585 ; 1540,3640 1605,3640 1610,3635 1610,3505.86 1615.86,3500 ; 1615.86,3500 1615.86,3135.86 1621.72,3130 1900,3130 1930,3100 1930,3005 1930,2890 ; 1615.86,3500 1770,3500 ; 1930,2890 1965,2890 1965,2865 ; 1965,2865 1965,2805.86 1970.86,2800 2245,2800 ; 2245,2800 2275,2800 ; 2275,2800 2499.14,2800 2505,2794.14 2505,2595.86 2510.86,2590 2609.14,2590
  Bottom Layer w10: v1(1825,1935) 1884.14,1935 1890,1929.14 1890,1845.86 1895.86,1840 2065,1840 v1(2070,1835) ; v1(2055,3000) 2060,3005 3084.14,3005 3090,2999.14 3090,2565.86 3095.86,2560 3260,2560 3265.86,2554.14 3265.86,2509.14 v1(3270,2505)

## Polygon pours and split planes (outlines as drawn)
GND on Top Layer "GND_L01_P000" (solid, remove dead copper, pour order 0): 6000,4015 5985,4000 5985,-10 -5,-10 -5,3985
no net on Top Layer "NONET_L01_P001" (solid, pour order 1): 3720,3275
no net on nixie tubes "NONET_L02_P005" (none, pour order 5): 2410,2920
no net on nixie tubes "NONET_L02_P003" (none, pour order 3): 2400,2935

## Silkscreen, mask and mechanical layers (free items; w line width, h text height)
Top Overlay:
  text "POW Nixie clock / Ahmet yasin Cagliyan  / Schooljaar 2019-2020 / 1EaC" at 4125,3070 h60

## Text inside footprints (layer, text, board x,y; h text height)
B1: Top Overlay "-" at 3715.24,2127.09 h59.06 r90; Top Overlay "+" at 3549.88,2124.13 h59.06 r90
C2: Top Overlay "+" at 630,3517.87 h59.06 r270